# EAGLE board motor_dc (EAGLE 9.7.0)

Size 69.63 x 44.97 mm. Coordinates in mm from the lower left corner, seen from the top.
Outline: 0,0 69.63,0 69.63,44.98 0,44.98 0,0
Copper layers (1*16): Top 0.035mm / dielectric 1.5mm / Bottom 0.035mm
Design rules "default": minimum track width 6mil, minimum drill 0.35mm, track to track 6mil, track to pad 6mil, pad to pad 6mil, via to via 6mil, smd to smd 6mil, copper to edge 40mil, drill to drill 6mil, minimum pad ring 10mil, minimum via ring 8mil, stop-mask expansion 4mil, vias tented up to drill 0mil, thermal gap 10mil

## Footprints (pad centres in the part's own frame; a part is rotated, then mirrored left to right if it is on the bottom)
BATTERY-GENERIC = drill 1.118 pad 3.15 octagon: + 2.54,0; - -2.54,0
MOTOR = drill 1.118 pad 3.15 octagon: + 2.54,0; - -2.54,0
SWITCH-SPDT-PTH-8.5X3.7MM = drill 1.016 pad 1.88: 1 -2.54,0; 2 0,0; 3 2.54,0

## Placement (x,y rotation side)
BAT1  9V  [BATTERY-GENERIC]  61.37,8.26 270 top
BAT2  9V  [BATTERY-GENERIC]  8.26,8.55 90 top
M1  MOTOR_HDR  [MOTOR]  49.51,34.78 0 top
M2  MOTOR_HDR  [MOTOR]  18.73,36.72 0 top
S1  TOGGLE  [SWITCH-SPDT-PTH-8.5X3.7MM]  51.77,19 270 top
S2  TOGGLE  [SWITCH-SPDT-PTH-8.5X3.7MM]  19.64,19.89 90 top

## Library data of the parts
BAT1 BAT2 M1 M2 S1 S2 = Tinkercad

## Nets
BAT1+: BAT1.+ S1.3
BAT1-: BAT1.- M1.-
BAT2+: BAT2.+ M2.+
BAT2-: BAT2.- S2.1
M1_+: M1.+ S1.2
M2_-: M2.- S2.3

## Tracks (layer width: path | path; a pad name or v marks a point on that pad's centre or on a via)
BAT1+  (1 unrouted)
BAT1-  (1 unrouted)
BAT2+  (1 unrouted)
BAT2-  (1 unrouted)
M1_+  (1 unrouted)
M2_-  (1 unrouted)